# Altium PCB Attenuator_Proto.PcbDoc
Units mil, origin at the board's own origin, x right, y up, seen from the top; angles counter-clockwise.
Board outline 3339.97 x 2314.97 mil, 2 copper layers (Top Layer, Bottom Layer); 101 components, 60 nets, 413 pads, 43 vias.
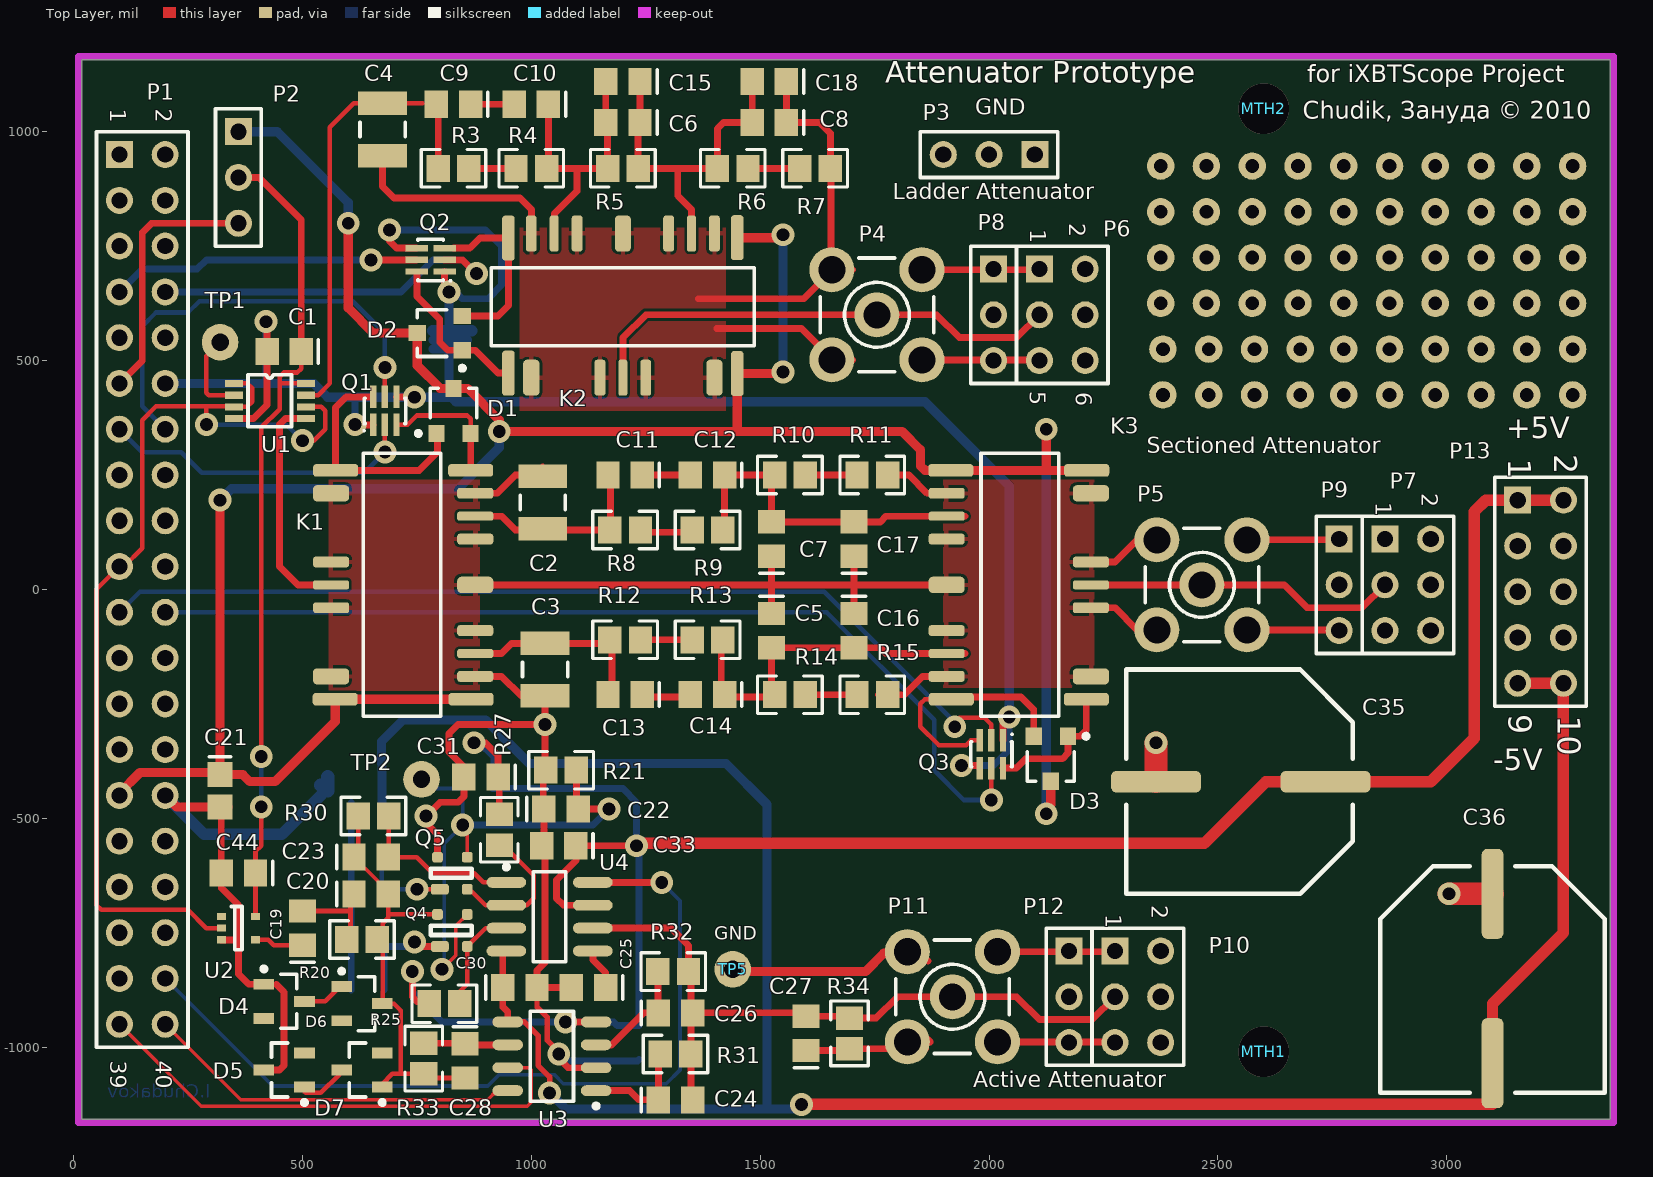
[diagram p0: Top Layer view]
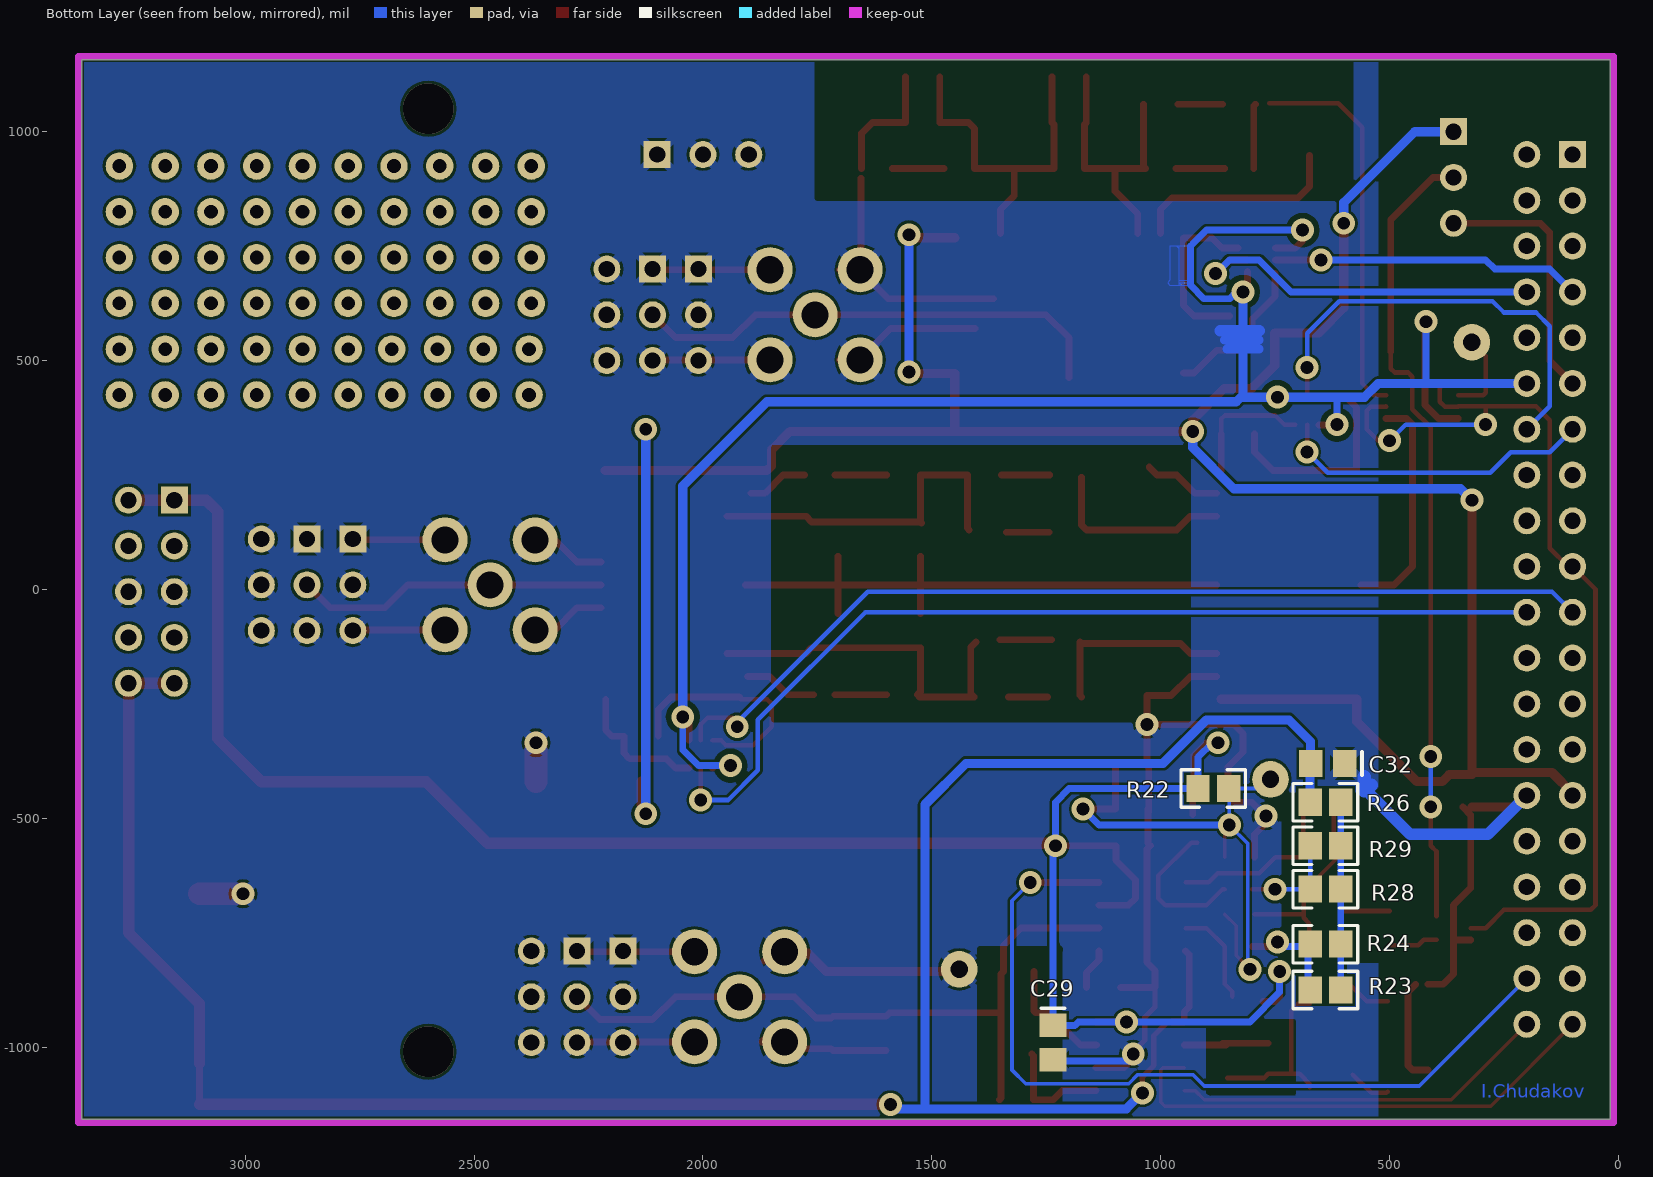
[diagram p1: Bottom Layer view, seen from below]

## Layer stack, top to bottom
Top Layer: signal copper 1.4
Dielectric: dielectric 12.6, FR-4, Dk 4.8
Bottom Layer: signal copper 1.4

## Board outline
17.52,-1157.48 17.52,1157.48 3357.48,1157.48 3357.48,-1157.48

## Design rules (kind name [scope] priority, off if disabled: settings)
Clearance [All] p1: gap=6
DiffPairsRouting [All] p1: maxlimit=10 minlimit=6 mostfreqgap=8 maxuncoupledlength=500
HoleSize [All] p1: absolutevalues=TRUE maxlimit=300 minlimit=13 maxpercent=80.000 minpercent=20.000
HoleToHoleClearance [All] p1: gap=6 allowstackedmicrovias=TRUE
MinimumAnnularRing [All] p1: minimumring=7
MinimumSolderMaskSliver [All] p1: minsoldermaskwidth=1
PlaneConnect [All] p1: planeconnectstyle=Relief reliefexpansion=20 reliefentries=4 reliefconductorwidth=20 reliefairgap=10
PolygonConnect [All] p1: connectstyle=Relief reliefconductorwidth=20 reliefentries=4 polygonreliefangle="45 Angle"
RoomDefinition Attenuator_Proto [InComponentClass('Attenuator_Proto')] p1: confinementstyle=ConfineOut formatcopy=TRUE lockcomponents=FALSE outline 60,1205 420,1205 420,1280 60,1280
RoomDefinition Att_steet_1 [InComponentClass('Att_steet_1')] p2: confinementstyle=ConfineOut formatcopy=TRUE lockcomponents=FALSE outline 40,-1305 220,-1305 220,-1210 40,-1210
RoutingVias [All] p1: holewidth=20 width=38 viastyle="Through Hole" minholewidth=13 minwidth=28 maxholewidth=28 maxwidth=50
SilkToSilkClearance [All] p1: silktosilkclearance=6
SilkscreenOverComponentPads [All] p1: minsilkscreentomaskgap=6
SolderMaskExpansion [All] p1: expansion=4
Width [All] p1: maxlimit=50 minlimit=6 preferedwidth=10
21 further rules are at their usual default settings.

## Classes and differential pairs
component class Attenuator_Proto: C1 C2 C3 C4 C5 C6 C7 C8 C9 C10 C11 C12 C13 C14 C15 C16 C17 C18 C21 D1 D2 D3 K1 K2 K3 MTH1 MTH2 P1 P2 P3 P4 P5 P6 P7 P8 P9 Q1 Q2 Q3 R3 R4 R5 R6 R7 R8 R9 R10 R11 R12 R13 R14 R15 TP1 U1
component class Att_steet_1: 1 C19 C20 C22 C23 C24 C25 C26 C27 C28 C29 C30 C31 C32 C33 C35 C36 C44 D4 D5 D6 D7 P10 P11 P12 P13 Q4 Q5 R20 R21 R22 R23 R24 R25 R26 R27 R28 R29 R30 R31 R32 R33 R34 TP2 TP5 U2 U3 U4

## Components (designator, comment, footprint, x,y, rotation, side; value= is the part's Value field where it differs from the comment)
C1 "Cap" C0805 460,520 r180 top
C2 "Cap Var" CAPC3225N 1025,190 r270 top
C3 "Cap Var" CAPC3225N 1030,-175 r90 top
C4 "Cap Var" CAPC3225N 675,1005 r90 top
C5 "Cap" c0805 1525,-90 r270 top
C6 "Cap" c0805 1200,1020 r180 top
C7 "Cap" c0805 1525,110 r90 top
C8 "Cap" c0805 1520,1020 r180 top
C9 "Cap" c0805 830,1060 r180 top
C10 "Cap" c0805 1000,1060 r180 top
C11 "Cap" c0805 1205,250 r180 top
C12 "Cap" c0805 1385,250 r180 top
C13 "Cap" c0805 1205,-230 r180 top
C14 "Cap" c0805 1385,-230 r180 top
C15 "Cap" c0805 1200,1110 r180 top
C16 "Cap" c0805 1705,-90 r270 top
C17 "Cap" c0805 1705,110 r90 top
C18 "Cap" c0805 1520,1110 r180 top
C19 "C0805" 0805#1 500,-740 r90 top
C20 "C0805" 0805#1 650,-665 r0 top
C21 "Cap Semi" CAPC2512L 320,-440 r270 top
C22 "C0805" 0805#1 1065,-480 r0 top
C23 "C0805" 0805#1 650,-585 r0 top
C24 "C0805" 0805#1 1315,-1115 r0 top
C25 "Cap Semi" C0805 1125,-870 r180 top
C26 "C0805" 0805#1 1315,-925 r0 top
C27 "C0805" 0805#1 1600,-970 r90 top
C28 "C0805" 0805#1 855,-1030 r270 top
C29 "C0805" 0805#1 1235,-990 r270 bottom
C30 "C0805" 0805#1 975,-870 r0 top
C31 "C0805" 0805#1 890,-410 r180 top
C32 "C0805" 0805#1 635,-380 r0 bottom
C33 "C0805" 0805#1 1060,-560 r180 top
C35 "Cap" H13 2550,-420 r90 top
C36 "Cap" H13 3100,-850 r180 top
C44 "Cap" C0805 360,-620 r180 top
D1 "BAS40-05" SOT-23 830,390 r0 top
D2 "BAS40-05" SOT-23 800,560 r90 top
D3 "BAS40-05" SOT-23 2135,-370 r180 top
D4 "Diode BAS21" SOT95P240-3N 460,-900 r0 top
D5 "Diode BAS21" SOT95P240-3N 460,-1050 r180 top
D6 "Diode BAS21" SOT95P240-3N 630,-905 r0 top
D7 "Diode BAS21" SOT95P240-3N 630,-1050 r180 top
K1 "HF3_2coils_latching" HF3-75_Ohm 720,10 r0 top
K2 "HF3_2coils_latching" HF3-75_Ohm 1200,620 r90 top
K3 "HF3_2coils_latching" HF3-75_Ohm 2065,10 r180 top
MTH1 "MOUNT_HOLE" MTHOLE_UEG_EU_BE 2600,-1010 r90 top
MTH2 "MOUNT_HOLE" MTHOLE_UEG_EU_BE 2600,1050 r90 top
P1 "Header 20X2" HDR2X20 100,950 r270 top locked
P2 "Header 3" HDR1X3 360,1000 r270 top
P3 "Header 3" HDR1X3 2100,950 r180 top
P4 "SMB" SMB_V-RJ45 1755,600 r0 top
P5 "SMB" SMB_V-RJ45 2465,10 r0 top
P6 "Header 3X2" HDR2X3 2110,700 r270 top
P7 "Header 3X2" HDR2X3 2865,110 r270 top
P8 "Header 3" HDR1X3 2010,700 r270 top
P9 "Header 3" HDR1X3 2765,110 r270 top
P10 "Header 3X2" HDR2X3 2275,-790 r270 top
P11 "SMB" SMB_V-RJ45 1920,-890 r0 top
P12 "Header 3" HDR1X3 2175,-790 r270 top
P13 "Header 5X2" HDR2X5 3155,195 r270 top
Q1 "DDCxxxxU" SOT-363 680,390 r0 top
Q2 "DDCxxxxU" SOT-363 780,720 r90 top
Q3 "DDCxxxxU" SOT-363 2005,-360 r180 top
Q4 "MOSFET" SOT143 825,-745 r0 top
Q5 "MOSFET" SOT143 825,-620 r0 top
R3 "Res2" 0805#2 830,920 r180 top
R4 "Res2" 0805#2 1000,920 r180 top
R5 "Res2" 0805#2 1200,920 r180 top
R6 "Res2" 0805#2 1440,920 r180 top
R7 "Res2" 0805#2 1620,920 r180 top
R8 "Res2" 0805#2 1205,130 r180 top
R9 "Res2" 0805#2 1385,130 r180 top
R10 "Res2" 0805#2 1565,250 r180 top
R11 "Res2" 0805#2 1745,250 r180 top
R12 "Res2" 0805#2 1205,-110 r180 top
R13 "Res2" 0805#2 1385,-110 r180 top
R14 "Res2" 0805#2 1565,-230 r180 top
R15 "Res2" 0805#2 1745,-230 r180 top
R20 "ERA6Y" 0805#2 630,-765 r180 top
R21 "ERA6Y" 0805#2 1065,-395 r180 top
R22 "ERA6Y" 0805#2 885,-435 r180 bottom
R23 "ERA6Y" 0805#2 640,-875 r0 bottom
R24 "ERA6Y" 0805#2 640,-775 r0 bottom
R25 "ERA6Y" 0805#2 810,-905 r0 top
R26 "ERA6Y" 0805#2 640,-465 r180 bottom
R27 "ERA6Y" 0805#2 930,-525 r270 top
R28 "ERA6Y" 0805#2 640,-655 r180 bottom
R29 "ERA6Y" 0805#2 640,-560 r180 bottom
R30 "ERA6Y" 0805#2 655,-495 r0 top
R31 "ERA6Y" 0805#2 1315,-1015 r0 top
R32 "ERA6Y" 0805#2 1310,-835 r0 top
R33 "ERA6Y" 0805#2 765,-1025 r270 top
R34 "ERA6Y" 0805#2 1695,-970 r90 top
TP1 "TESTPOINT" TESTPOINT 320,540 r0 top
TP2 "TESTPOINT" TESTPOINT 760,-415 r0 top
TP5 "TESTPOINT" TESTPOINT 1440,-830 r0 top
U1 "SN74LVC3G17DCTR" sm8 350,450 r0 top
U2 "SN74LVC1G17" SC_70_5 360,-740 r270 top
U3 "AD8180" SOIC127P600-8AL 1045,-1020 r180 top
U4 "AD707AR" SO-8_N 1040,-715 r0 top

## Footprints (in the part's own frame and the unit in brackets; to place one, negate y for a bottom-side part, rotate by r counter-clockwise, add the part's x,y. Pads: shape width x height; smd on the part's side, far side on the other; paste and mask are expansions set on the pad)
0805#1 [mm] "Chip Capacitor; Body 2.0 x 1.2 mm (LxW typ)"
  rect 1.3x1.5 smd: 1(-0.95,0) 2(0.95,0)
  silkscreen extent -1.9,-0.65 -1.9,0.65
0805#2 [mm] "0805 from SM-752 data"
  rect 1.3x1.5 smd: 1(-0.85,0) 2(0.85,0)
  silkscreen extent -1.79,-1.04 1.79,1.04, body extent -1.1,-0.72 1.1,0.72, height 1.1
C0805 [mm] "Chip Capacitor; Body 2.0 x 1.2 mm (LxW typ)"
  rect 1.3x1.5 smd: 1(-0.95,0) 2(0.95,0)
  silkscreen extent -1.9,-0.65 -1.9,0.65
c0805 [mm] "Chip Capacitor; Body 2.0 x 1.2 mm (LxW typ)"
  rect 1.3x1.5 smd: 1(-0.95,0) 2(0.95,0)
  silkscreen extent -1.9,-0.65 -1.9,0.65
CAPC2512L [mm] "Chip Capacitor, Body 2.54x1.27mm, IPC High Density"
  rect 1.4x1.4 smd: 1(-0.9,0) 2(0.9,0)
  silkscreen extent -1.9,-0.6 -1.9,0.6, body extent -1.45,-0.82 1.45,0.82, height 1.3
CAPC3225N [mm] "Chip Capacitor, Body 3.2x2.5mm, IPC Medium Density"
  rect 1.3x2.7 smd: 1(-1.45,0) 2(1.45,0)
  silkscreen extent -0.4,-1.25 0.4,1.25, body extent -1.7,-1.35 1.7,1.35, height 1.5
H13 [mm] "Lyt aluminum Cap SMD"
  rrect50% 1.2x5 smd: 1(0,-4.699) 2(0,4.699)
  silkscreen extent -6.22,-6.22 6.22,6.35
HDR1X3 [mm] "Connector; Header; 3 Position"
  rect 1.5x1.5 hole 0.9: 1(0,0)
  round 1.5 hole 0.9: 2(2.54,0) 3(5.08,0)
  silkscreen extent -1.27,-1.27 6.35,1.27
HDR2X3 [mm] "Connector; Header; 3x2 Position"
  rect 1.5x1.5 hole 0.9: 1(0,0)
  round 1.5 hole 0.9: 2(0,2.54) 3(2.54,0) 4(2.54,2.54) 5(5.08,0) 6(5.08,2.54)
  silkscreen extent -1.27,-1.27 6.35,3.81
HDR2X5 [mm] "Connector; Header; 5x2 Position"
  rect 1.5x1.5 hole 0.9: 1(0,0)
  round 1.5 hole 0.9: 2(0,2.54) 3(2.54,0) 4(2.54,2.54) 5(5.08,0) 6(5.08,2.54) 7(7.62,0) 8(7.62,2.54) 9(10.16,0) 10(10.16,2.54)
  silkscreen extent -1.27,-1.27 11.43,3.81
HDR2X20 [mm] "Connector; Header; 20x2 Position"
  rect 1.5x1.5 hole 0.9: 1(0,0)
  round 1.5 hole 0.9: 2(0,2.54) 3(2.54,0) 4(2.54,2.54) 5(5.08,0) 6(5.08,2.54) 7(7.62,0) 8(7.62,2.54) 9(10.16,0) 10(10.16,2.54) 11(12.7,0) 12(12.7,2.54) 13(15.24,0) 14(15.24,2.54) 15(17.78,0) 16(17.78,2.54) 17(20.32,0) 18(20.32,2.54) 19(22.86,0) 20(22.86,2.54) 21(25.4,0) 22(25.4,2.54) 23(27.94,0) 24(27.94,2.54) 25(30.48,0) 26(30.48,2.54) 27(33.02,0) 28(33.02,2.54) 29(35.56,0) 30(35.56,2.54) 31(38.1,0) 32(38.1,2.54) 33(40.64,0) 34(40.64,2.54) 35(43.18,0) 36(43.18,2.54) 37(45.72,0) 38(45.72,2.54) 39(48.26,0) 40(48.26,2.54)
  silkscreen extent -1.27,-1.27 49.53,3.81
HF3-75_Ohm [mm]
  rrect50% 2.5x0.7 smd: 1(-3.746,6.35) 11(-3.771,-6.35) 12(3.771,-6.35) 22(3.747,6.35)
  rrect50% 2x0.9 smd: 2(-4,5.08) 10(-4,-5.08) 17(4,0)
  rrect50% 2x0.6 smd: 5(-4,1.27) 7(-4,-1.27) 13(4,-5.08) 15(4,-2.54) 19(4,2.54) 21(4,5.08)
  rrect50% 2x0.5 smd: 6(-4,0) 14(4,-3.81) 20(4,3.81)
  silkscreen extent -2.22,-7.3 2.1,7.3, body extent -3.56,-7.37 3.56,7.37, height 10
MTHOLE_UEG_EU_BE [mil]
SC_70_5 [mil]
  rect 15.73x19.67 smd: 1(-25.58,-37.4) 2(0,-37.4) 3(25.58,-37.4) 4(25.58,37.4) 5(-25.58,37.4)
  silkscreen extent -47,-16 47,8
sm8 [mm]
  rect 1x0.4 smd: 1(0,0) 2(0,-0.65) 3(0,-1.3) 4(0,-1.95) 5(4,-1.95) 6(4,-1.3) 7(4,-0.65) 8(4,0)
  silkscreen extent 0.79,-2.41 3.2,0.48, body extent 0.69,-2.51 3.3,0.58, height 1.3
SMB_V-RJ45 [mm] "Connector; SMB Straight"
  round 2.5 hole 1.5: 1(0,0) 2(-2.5,-2.5) 2(-2.5,2.5) 2(2.5,-2.5) 2(2.5,2.5)
  silkscreen extent -3.15,-3.15 3.15,3.15
SO-8_N [mm] "SOIC, 8-Leads, Body 4.9x3.9mm, Pitch 1.27mm, IPC Medium Density"
  oval 2.2x0.6 smd: 1(-2.4,1.905) 2(-2.4,0.635) 3(-2.4,-0.635) 4(-2.4,-1.905) 5(2.4,-1.905) 6(2.4,-0.635) 7(2.4,0.635) 8(2.4,1.905)
  silkscreen extent -2.52,-2.5 0.9,2.88, body extent -1.95,-2.45 1.95,2.45, height 1.75
SOIC127P600-8AL [mm] "SOIC, 8-Leads, Body 4.9x3.9mm, Pitch 1.27mm, IPC High Density"
  oval 1.7x0.6 smd: 1(-2.45,1.905) 2(-2.45,0.635) 3(-2.45,-0.635) 4(-2.45,-1.905) 5(2.45,-1.905) 6(2.45,-0.635) 7(2.45,0.635) 8(2.45,1.905)
  silkscreen extent -2.58,-2.5 1.2,2.88, body extent -2,-2.5 2,2.5, height 2.72
SOT95P240-3N [mm] "SOT23, 3-Leads, Body 2.9x1.3mm, Pitch 0.95mm, Lead Span 2.4mm, IPC Medium Density"
  rect 1.15x0.6 smd: 1(-1.125,0.95) 2(-1.125,-0.95) 3(1.125,0)
  silkscreen extent -1.25,-1.5 0.7,1.92, body extent -0.7,-1.5 0.7,1.5, height 1.14
SOT143 [mm]
  rrect50% 1x0.6 smd: 1(-0.635,-0.889)
  rrect50% 0.6x0.6 smd: 2(0.889,-0.889) 3(0.889,0.889) 4(-0.762,0.889)
  silkscreen extent -1.14,-0.25 1.14,0.25
SOT-23 [mm] "SOT-23; 3 Leads; Body 3.0 x 2.6 mm, inc. leads (LxW max)"
  rect 0.9x0.95 smd: 1(-0.95,-1.25) 2(0.95,-1.25) 3(0,1.25)
  silkscreen extent -2.07,-1.37 1.3,1.25
SOT-363 [mm] "SOT-363/SC-88; 6 Leads; Body 2.2 x 2.2 mm, inc. leads (LxW max)"
  rect 0.35x1.25 smd: 1(-0.65,-0.775) 2(0,-0.775) 3(0.65,-0.775) 4(0.65,0.775) 5(0,0.775) 6(-0.65,0.775)
  silkscreen extent -1.2,-1.15 1.15,0.7
TESTPOINT [mil]
  round 80 hole 37.99: 1(0,0)

## Part data
C1 C5 C6 C7 C8 C9 C10 C11 C12 C13 C14 C15 C16 C17 C18 C44: "Capacitor"
C2 C3 C4: "Variable or Adjustable Capacitor"
C19 C20 C22 C23 C24 C26 C27 C28 C29 C30 C31 C32 C33: "Ceramic Chip Capacitor - Standard"
C21 C25: "Capacitor (Semiconductor SIM Model)"
C35 C36: library part "Lyt Cap"
D1 D2 D3: "Silicon AF Schottky Diode for High-Speed Switching"
D4 D5 D6 D7: "Silicon Switching Diode for High-Speed, High-Voltage Switching"
K1 K2 K3: "HF3 Relay, Latching type, 2 coils"
P1: "Header, 20-Pin, Dual row"
P2 P3 P8 P9 P12: "Header, 3-Pin"
P4 P5 P11: "SMB Straight Connector"
P6 P7 P10: "Header, 3-Pin, Dual row"
P13: "Header, 5-Pin, Dual row"
Q1 Q2 Q3: "NPN PRE-BIASED SMALL SIGNAL DUAL SURFACE MOUNT TRANSISTOR"
Q4 Q5: library part BF998, "Dual-gate MOSFET"
R3 R4 R5 R6 R7 R8 R9 R10 R11 R12 R13 R14 R15: "Resistor"
R20 R21 R22 R23 R24 R25 R26 R27 R28 R29 R30 R31 R32 R33 R34: "Rectangular Thick Film Chip Resistor, 10 Ohm to 1M Ohm Range, 0.1% and 0.5% Tolerance, 0805 Size, 0.1 W"
TP1 TP2 TP5: "TEST POINT.  No entry in BOM."
U4: "Ultra-Low Drift Operational Amplifier"

## Free pads (board coordinates)
  round 60 hole 30: 0(2380,525) 0(2480,525) 0(2580,525) 0(2680,525) 0(2775,525) 0(2875,525) 0(2875,625) 0(2875,725) 0(2875,825) 0(2875,925) 0(2975,525) 0(3075,525) 0(3175,525) 0(3275,525) 1(2380,425) 1(2480,425) 1(2580,425) 1(2680,425) 1(2775,425) 1(2775,625) 1(2775,725) 1(2775,825) 1(2775,925) 1(2875,425) 1(2975,425) 1(3075,425) 1(3175,425) 1(3275,425) 2(2675,625) 2(2675,725) 2(2675,825) 2(2675,925) 2(3275,625) 2(3275,725) 2(3275,825) 2(3275,925) 3(2575,625) 3(2575,725) 3(2575,825) 3(2575,925) 3(3175,625) 3(3175,725) 3(3175,825) 3(3175,925) 4(2475,625) 4(2475,725) 4(2475,825) 4(2475,925) 4(3075,625) 4(3075,725) 4(3075,825) 4(3075,925) 5(2375,625) 5(2375,725) 5(2375,825) 5(2375,925) 5(2975,625) 5(2975,725) 5(2975,825) 5(2975,925)

## Via types
v1: diameter 50, hole 28, Top Layer to Bottom Layer, 41 vias
v2: diameter 110.24, hole 110.24, Top Layer to Bottom Layer, 2 vias

## Nets (pads, with @x,y where several pads share a name; then routed paths per layer and width w, separated by ;. In a path a pad name is that pad's centre, name@x,y a point inside that pad or via, vN(x,y) a via of type N, cw(c..) or ccw(c..) an arc to the next point about the centre after c; other vN are vias at no path point)
3V: C21.1 D1.3 D2.3 D3.3 K1.11 K1.12 K2.11 K2.12 K3.11 K3.12 P1.29 P2.1 | length 6200.7
  Top Layer w20: P1.29 100,-445 145,-400 315.43,-400 C21.1 ; v1(320,195) C21.1 ; v1(600,800) 600,615 655,560 D2.3 750.79,489.21 800.79,439.21 D1.3 860.79,439.21 930,370 v1(930,345) 1450,345 ; K1.12 K1.11 571.52,-288.48 440,-420 385,-420 369.57,-404.57 C21.1 ; K2.12 1543.48,768.48 v1(1550,775) ; v1(1550,475) 1546.52,471.52 K2.11 1450,345 ; v1(2125,-490) 2130,-480 2135,-470 D3.3 ; v1(2125,350) 2125,260 ; K3.11 2125,260 ; 1450,345 1810,345 1850,305 1850,270 1860,260 K3.12 2125,260
  Bottom Layer w20: v1(320,195) 345,220 840,220 930,310 v1(930,345) ; P2.1 445,1000 600,845 v1(600,800) ; v1(1550,475) v1(1550,775) ; v1(2125,-490) v1(2125,350)
5V: P1.11 P2.3 | length 569
  Top Layer w15: P1.11 150,500 150,780 170,800 P2.3
+5V: C29.1 C31.1 C33.1 C35.1 P13.1 P13.2 R22.1 R25.1 R27.1 U3.4 U4.7 | length 4826.8
  Top Layer w15: v1(740,-835) 740,-890 750,-900 R25.1@776.54,-900 ; 900,-335 927.4,-362.4 C31.1 930,-412.6 R27.1 ; v1(1075,-945) U3.4 ; U4.7 1070,-690 1055,-675 1055,-635 1097.4,-592.6 C33.1 v1(1230,-560)
  Top Layer w20: v1@1225,-565 v1@1235,-555
  Top Layer w25: v1@1235,-555 2470,-555 2605,-420 C35.1 2965,-420 3060,-325 3060,170 3085,195 P13.1 P13.2
  Bottom Layer w15: v1(740,-835) 740,-880 805,-945 v1(1075,-945) 1180,-945 1187.6,-952.6 C29.1 v1@1235,-560 ; v1(875,-335) 886.93,-335 918.46,-366.54 R22.1 ; R22.1@915,-435 R22.1 ; v1(1230,-560) 1230,-465 1200,-435 R22.1
-5V: C30.1 C32.2 C36.2 P13.9 P13.10 R26.1 U3.5 U4.4 | length 5312.3
  Top Layer w12: U3.5 985,-945 1015,-975 1015,-1040 1040,-1065 v1(1040,-1100)
  Top Layer w15: U4.4 937.6,-797.91 C30.1 937.6,-912.6 948.54,-923.54 U3.5 U3.5@975,-945 ; C36.2@3100,-1125 C36.2
  Top Layer w25: v1@1585,-1135 1595,-1125 C36.2@3100,-1125 ; C36.2 3100,-905 3255,-750 P13.10 P13.9
  Bottom Layer w20: R26.1 673.46,-381.06 C32.2 672.4,-332.6 720,-285 900,-285 995,-380 1425,-380 1515,-470 1515,-1135 ; v1(1040,-1100) 1075,-1135 1515,-1135 ; v1(1590,-1125) 1580,-1135 1515,-1135
ATT1: C4.2 C9.2 R3.2 U1.7 | length 988.9
  Top Layer w10: U1.7 534.41,424.41 560,450 560,1010 612.09,1062.09 762.6,1062.09
  Top Layer w15: C9.2 796.54,1056.06 R3.2
ATT2: K1.6 U1.5 | length 502
  Top Layer w15: U1.5 463.23,373.23 450,360 450,50 490,10 K1.6
ATT10: C2.2 C11.2 K1.20 R8.2 | length 416.1
  Top Layer w15: K1.20 935,160 965,130 1161.54,130 1172.6,141.06 C11.2@1172.6,245
ATT100: C3.2 C13.2 K1.14 R12.2 | length 431
  Top Layer w15: K1.14 935,-140 957.09,-117.91 C3.2 1173.62,-117.91 1176.54,-115 1176.54,-231.06 C13.2@1172.6,-235
CLK: P1.19 U1.1 U1.3 U1.6 U2.2 | length 2144.5
  Top Layer w10: v1(290,360) 290,400 ; U2.2 290,-740 250,-700 60,-700 50,-690 50,0 P1.19 110,50 150,90 150,370 180,400 290,400 ; U1.3 378.82,398.82 390,410 390,440 380,450 U1.1 ; U1.3@350,400 290,400 ; v1(500,325) 525,325 550,350 550,390 541.18,398.82 U1.6 U1.6@508.66,400
  Bottom Layer w10: v1(290,360) 465,360 v1(500,325)
GND: C1.2 C2.1 C3.1 C4.1 C5.1 C7.1 C8.1 C16.1 C17.1 C18.1 C21.2 C22.1 C25.2 C27.1 C29.2 C30.2 C31.2 C32.1 C33.2 C35.2 C36.1 C44.2 D4.1 D5.3 K1.2 K1.5 K1.7 K1.10 K1.13 K1.15 K1.17 K1.19 K1.21 K2.2 K2.5 K2.7 K2.10 K2.13 K2.15 K2.17 K2.19 K2.21 K3.2 K3.5 K3.7 K3.10 K3.13 K3.15 K3.17 K3.19 K3.21 P1.12 P1.30 P3.1 P3.2 P3.3 P4.2 P5.2 P6.1 P6.2 P6.4 P6.5 P6.6 P7.1 P7.2 P7.4 P7.5 P7.6 P8.1 P8.2 P8.3 P9.1 P9.2 P9.3 P10.1 P10.2 P10.4 P10.5 P10.6 P11.2 P12.1 P12.2 P12.3 P13.5 P13.6 Q1.1 Q1.4 Q2.1 Q2.4 Q3.1 Q3.4 Q5.4 R7.1 R11.1 R15.1 R21.2 R34.1 TP5.1 U1.4 U2.3 U3.2 | length 13361.7
  Top Layer w12: C30.2 1012.4,-912.4 1035,-935 1035,-985 1055,-1005 v1@1055,-1020
  Top Layer w15: U2.3 355.58,-765.58 360,-770 ; C21.2@340,-475.43 322.6,-492.83 C44.2 322.6,-652.6 360,-690 360,-770 ; U1.4 393.23,373.23 422.6,402.6 C1.2 v1@422.6,572.4 ; D5.3 450,-1050 460,-1040 460,-880 442.6,-862.6 ; D4.1 382.6,-862.6 360,-840 360,-770 ; v1@615.51,359.49 Q1.1 ; C4.1 675,880 700,855 975,855 1000,830 K2.21 ; v1@690,761.18 705.59,745.59 Q2.4 ; Q1.4 v1@744.49,420.51 ; Q5.4 795,-535 770,-510 v1(770,-495) 800,-465 840,-465 852.6,-452.4 C31.2 852.6,-387.6 820,-355 820,-315 840,-295 v1(1030,-295) C3.1 977.09,-232.09 935,-190 K1.13 ; v1@810.51,659.49 Q2.1 ; K1.17 1525,10 ; K1.21 925,210 965,250 1007.91,250 C2.1@1025,267.09 ; C22.1@1026.06,-485 1026.06,-388.94 1030,-385 1030,-316.54 v1@1028.46,-315 ; C22.1 1027.6,-555 C33.2 1030,-567.4 1030,-815 1012.4,-832.6 C30.2 C25.2 ; v1@1050,-1015 1055,-1020 1080,-1045 U3.2 ; 1365,635 1595,635 1658.43,698.43 P4.2@1701.57,698.43 ; 1405,570 1590,570 1658.43,501.57 P4.2@1701.57,501.57 ; C5.1 1525,10 ; C7.1 1525,10 ; C18.1@1557.4,1120 C8.1 1630,1020 1653.46,996.54 R7.1 ; C27.1 1716.06,-1007.4 1720,-1003.46 P11.2@1861.61,-1003.46 ; P4.2@1655,698.43 R7.1@1655,898.46 ; C16.1 1705,10 ; C17.1 1705,10 ; R15.1@1758.46,-230 1815,-230 1854.99,-190.01 K3.21@1902.52,-190.01 ; R11.1 1825,250 1865,210 K3.13@1895,210 ; P11.2@1850,-795 1866.57,-811.57 ; P4.2@1853.43,698.43 P6.1@2098.43,698.43 ; P11.2@1866.61,-983.46 1871.57,-988.43 ; P4.2@1898.43,501.57 P6.5@2098.43,501.57 ; K3.17 1705,10 ; v1(1940,-385) 1973.9,-385 Q3.4 ; P8.3@2008.43,501.57 P8.3 ; P8.1@2008.43,698.43 P8.1 ; Q3.1 v1@2030.59,-289.41 ; 2068.43,-988.43 P10.5@2248.43,-988.43 ; 2068.43,-791.57 P10.1@2248.43,-791.57 ; P12.3@2173.43,-988.43 P12.3 ; P12.1@2173.43,-791.57 P12.1 ; K3.5 2275,-40 2323.43,-88.43 P5.2@2366.57,-88.43 ; K3.7 2275,60 2323.43,108.43 P5.2@2366.57,108.43 ; P5.2@2353.43,108.43 P5.2@2366.57,108.43 ; P5.2@2360,115 P5.2@2366.57,108.43 ; P5.2@2563.43,-88.43 2763.43,-88.43 P9.3 ; P5.2@2563.43,108.43 2763.43,108.43 P9.1 ; 1525,10 1705,10
  Top Layer w20: P1.30 225.43,-475.43 C21.2 ; TP5.1@1440,-835 1730,-835 1770,-795 P11.2@1850,-795
  Top Layer w50: C35.2 v1(2365,-335) ; v1(3005,-665) C36.1
  Bottom Layer w15: 420,455 v1(420,585) ; v1(615,360) 615,420 ; v1(690,785) 900,785 930,755 ; v1(820,650) 835,650 850,635 905,635 935,665 935,750 ; v1(1060,-1015) 1050,-1015 1065,-1030 1232.4,-1030 C29.2 ; v1(1940,-385) 2010,-385 2044.05,-350.95 v1(2044.05,-278.5)
  Bottom Layer w20: P1.12 525,450 555,420 615,420 v1(745,420) 820,420 ; 785,525 820,525 ; 785,545 820,545 ; v1(820,650) 820,565 820,545 ; 855,525 820,525 ; 860,545 820,545 ; v1(2044.05,-278.5) 2044.05,225.95 1860,410 835,410 820,425 820,525 ; 820,525 820,545
  Bottom Layer w25: P1.30 285,-535 455,-535 542.5,-447.5 ; 785,565 820,565 870,565
  Bottom Layer w30: 540,-427.57 552.43,-440 555,-440 555.06,-439.94 555.06,-410
IN2_10: P1.13 Q1.2 | length 697.5
  Top Layer w10: v1(680,300) Q1.2
  Bottom Layer w10: P1.13 150,300 235,300 280,255 635,255 v1(680,300)
IN2_100: P1.14 Q1.5 | length 967
  Top Layer w10: Q1.5 v1(680,485)
  Bottom Layer w10: P1.14 150,400 150,575 180,605 250,605 275,630 610,630 680,560 v1(680,485)
NetC5_2: C5.2 C14.1 C16.2 K3.20 R13.1 R14.2 | length 787.2
  Top Layer w15: R13.1@1403.46,-115 1415,-126.54 1415,-227.4 1407.4,-235 1526.54,-235 R14.2 1525,-223.46 C5.2 C16.2 1762.4,-127.4 1775,-140 1947.52,-140
NetC6_1: C6.1 C8.2 C15.1 C18.2 K2.14 R5.1 R6.2 | length 797.8
  Top Layer w15: C15.1@1237.4,1120 C6.1 1233.46,1016.06 R5.1 1320,920 ; K2.14 1350,830 1320,860 1320,920 ; C18.2@1482.6,1120 C8.2 1420,1020 1406.54,1006.54 R6.2 1320,920
NetC6_2: C6.2 C10.1 C15.2 K2.20 R4.1 R5.2 | length 639.6
  Top Layer w15: C10.1 1037.4,923.94 R4.1 R5.2 1166.54,1016.06 C6.2 C15.2@1162.6,1120 ; K2.20 1050,820 1100,870 1100,920
NetC7_2: C7.2 C12.1 C17.2 K3.14 R9.1 R10.2 | length 758
  Top Layer w15: R9.1 1422.4,133.94 C12.1 1525,250 C7.2 ; C7.2@1522.6,145 C7.2 ; 1947.52,160 1775,160 1762.4,147.4 C17.2 C7.2
NetC9_1: C9.1 C10.2 | length 97.6
  Top Layer w15: C9.1@865,1060 C10.2
NetC11_1: C11.1 C12.2 | length 105.2
  Top Layer w15: C11.1 C12.2
NetC13_1: C13.1 C14.2 | length 85.2
  Top Layer w15: C13.1@1247.4,-235 C14.2@1332.6,-235
NetC19_1: C19.1 U2.4 | length 107.5
  Top Layer w10: U2.4 425.58,-765.58 437.4,-777.4 C19.1
NetC19_2: C19.2 C20.1 R20.2 | length 212.9
  Top Layer w10: C19.2 605,-702.6 ; C20.1 605,-672.6 605,-753.46 R20.2@616.54,-765
NetC20_2: C20.2 C23.1 C28.2 D6.3 D7.1 Q4.4 R20.1 R30.1 R33.2 | length 941.3
  Top Layer w8: C23.1 687.4,-659.8 C20.2
  Top Layer w10: C23.1@617.6,-585 621.54,-581.06 R30.1 ; D7.1 674.29,-1080.71 696.54,-1058.46 715,-1058.46 ; C20.2 687.4,-710 ; Q4.4 687.4,-710 ; C28.2 773.94,-1067.4 R33.2 715,-1058.46 ; 687.4,-710 687.4,-717.6 675,-730 675,-904.29 D6.3 700,-905 715,-920 715,-1058.46
NetC22_2: C22.2 Q4.3 Q5.3 R21.1 R22.2 TP2.1 | length 1245.1
  Top Layer w8: v1@800,-830 v1(805,-830) 835,-800 835,-735 Q4.3 ; v1(850,-515) 860,-525 Q5.3
  Top Layer w15: C22.2@1098.46,-480 R21.1@1098.46,-385 ; C22.2 v1(1170,-480)
  Bottom Layer w8: TP2.1 780,-435 R22.2 850,-436.54 v1(850,-515) ; v1(805,-830) 800,-830 810,-820 810,-555 v1(850,-515) ; v1@846.54,-518.46 v1(850,-515)
  Bottom Layer w15: v1(850,-515) 1135,-515 v1(1170,-480)
NetC23_2: C23.2 R30.2 U4.1 | length 367.5
  Top Layer w10: R30.2 688.46,-581.06 692.4,-585 750,-585 785,-620 875,-620 895,-640 U4.1
NetC24_1: C24.1 R31.1 U3.1 | length 246.1
  Top Layer w15: U3.1 1215,-1095 1235,-1115 C24.1 1277.6,-1018.94 R31.1
NetC25_1: C25.1 U4.5 | length 91.6
  Top Layer w15: U4.5 1134.49,-809.49 1162.4,-837.4 C25.1
NetC26_1: C26.1 R32.1 U3.3 | length 253.2
  Top Layer w15: U3.3@1140,-995 1175,-995 1245,-925 1272.6,-925 1276.54,-921.06 R32.1
NetC28_1: C28.1 R33.1 U3.6 | length 195
  Top Layer w15: R33.1 863.94,-991.54 C28.1@865,-992.6 ; C28.1 857.4,-995 U3.6
NetD1_1: D1.1 K1.1 Q1.6 | length 503.6
  Top Layer w15: Q1.6@650,420.51 595.51,420.51 572.52,397.52 K1.1 755,260 795,300 D1.1@795,340
NetD1_2: D1.2 K1.22 Q1.3 | length 286
  Top Layer w10: Q1.3 729.49,359.49 750,380 860,380 867.52,372.48 D1.2@867.52,340
  Top Layer w15: K1.22 D1.2@867.52,340
NetD2_1: D2.1 K2.1 Q2.6 | length 348.7
  Top Layer w15: Q2.6@750,690 750,640 800,590 800,540 817.4,522.6 D2.1 877.4,522.6 927.48,472.52 K2.1
NetD2_2: D2.2 K2.22 Q2.3 | length 386.2
  Top Layer w15: Q2.3@830.51,745.59 865.59,745.59 887.52,767.52 895,767.52 K2.22 950,620 927.4,597.4 D2.2
NetD3_1: D3.1 K3.1 Q3.6 | length 305.3
  Top Layer w15: Q3.6 2059.49,-390.51 2080,-370 2160,-370 2172.4,-357.6 D3.1 2199.21,-320.79 2212.48,-307.52 K3.1
NetD3_2: D3.2 K3.22 Q3.3 | length 519.2
  Top Layer w10: K3.22 1860,-240 1850,-250 1850,-300 1890,-340 1950,-340 1960.51,-329.49 Q3.3
  Top Layer w15: K3.22@1920,-235 2070,-235 2097.6,-262.6 D3.2
NetD4_3: D4.3 D6.1 | length 98.6
  Top Layer w10: D4.3 550,-900 D6.1@587.4,-862.6
NetD5_1: D5.1 D7.3 | length 93.4
  Top Layer w10: D5.1@504.29,-1097.4 506.89,-1100 540,-1100 D7.3@580,-1060
NetQ4_1: Q4.1 R23.2 R24.2 | length 235.7
  Top Layer w15: v1@750,-780 Q4.1
  Bottom Layer w15: R23.2@678.46,-875 678.46,-775 683.46,-780 750,-780 745,-775 v1(745,-770)
NetQ4_2: Q4.2 R25.2 U4.3 | length 218.9
  Top Layer w10: R25.2@843.46,-890 843.46,-878.54 860,-862 Q4.2 900,-740 U4.3
NetQ5_1: Q5.1 R28.1 R29.1 | length 221.5
  Top Layer w10: v1(750,-655) Q5.1
  Bottom Layer w10: R29.1 R28.1 v1(750,-655)
NetQ5_2: Q5.2 R27.2 U4.2 | length 330.3
  Top Layer w10: Q5.2 865,-655 900,-690 U4.2 990,-690 1005,-675 1005,-625 933.46,-553.46 R27.2@920,-553.46
NetR3_1: R3.1 R4.2 | length 106.5
  Top Layer w15: R3.1@860,920 R4.2
NetR6_1: R6.1 R7.2 | length 113.1
  Top Layer w15: R6.1 R7.2
NetR8_1: R8.1 R9.2 | length 93.1
  Top Layer w15: R8.1@1243.46,125 R9.2@1336.54,125
NetR10_1: R10.1 R11.2 | length 113.1
  Top Layer w15: R10.1 R11.2
NetR12_1: R12.1 R13.2 | length 113.1
  Top Layer w15: R12.1 R13.2
NetR14_1: R14.1 R15.2 | length 113.1
  Top Layer w15: R14.1 R15.2
NetR23_1: R23.1 R24.1 R26.2 R28.2 R29.2 | length 410
  Bottom Layer w15: R23.1 R24.1 R28.2 R29.2 R26.2
NetTP1_1: TP1.1 U1.2 | length 184.7
  Top Layer w10: TP1.1 290,510 290,430 295.59,424.41 U1.2
OP_EN: P1.38 U4.8 | length 1830.5
  Top Layer w15: U4.8 v1(1285,-640)
  Bottom Layer w8: P1.38 435,-1085 905,-1085 930,-1060 1050,-1060 1070,-1080 1295,-1080 1325,-1050 1325,-680 v1(1285,-640)
OUT1: K2.6 P4.1 P6.3 | length 1059.6
  Top Layer w15: K2.6 1200,550 1250,600 1885,600 1935,550 2060,550 P6.3
OUT1_10: P1.8 Q2.2 | length 803.8
  Top Layer w15: Q2.2@810,720 Q2.2 850,720 v1(880,690)
  Bottom Layer w15: P1.8 715,650 785,720 850,720 v1(880,690)
OUT1_100: P1.7 Q2.5 | length 678.5
  Top Layer w15: v1(650,720) Q2.5
  Bottom Layer w15: P1.7 150,700 270,700 290,720 v1(650,720)
OUT2: K3.6 P5.1 P7.3 | length 683.9
  Top Layer w15: K3.6 P5.1 2645,10 2695,-40 2815,-40 P7.3
OUT2_10: P1.21 Q3.2 | length 2106.5
  Top Layer w10: v1(1925,-300) 1925,-290 1935,-280 1990,-280 2005,-295 Q3.2
  Bottom Layer w10: P1.21 145,-5 1640,-5 1925,-290 v1(1925,-300)
OUT2_100: P1.22 Q3.5 | length 2108.8
  Top Layer w10: v1(2005,-460) Q3.5
  Bottom Layer w10: P1.22 1645,-50 1880,-285 1880,-395 1945,-460 v1(2005,-460)
OUT3_1_2: P1.39 U3.7 | length 1101.4
  Top Layer w8: P1.39 279,-1129 991,-1129 1000,-1120 1000,-1050 995,-1045 U3.7
OUT3_MAIN: C24.2 C26.2 C27.2 P10.3 P11.1 R31.2 R32.2 R34.2 U4.6 | length 1553.2
  Top Layer w15: U4.6 1305,-740 1343.46,-778.46 R32.2 1348.46,-840 R31.2 1348.46,-1111.06 C24.2 ; C26.2 1592.4,-925 C27.2 1716.06,-932.6 1720,-936.54 1753.46,-936.54 1800,-890 2060,-890 2110,-940 2225,-940 P10.3
SEL3A: P1.40 U3.8 | length 825.2
  Top Layer w8: P1.40 365,-1115 905,-1115 925,-1095 U3.8
SEL3B: P1.24
SRCV: C1.1 C44.1 P2.2 U1.8 U2.5 | length 1814.2
  Top Layer w10: U2.5 C44.1 397.4,-572.6 410,-560 v1(410,-475) ; v1(410,-365) 410,354 450,394 450,450 ; C1.1 497.4,482.4 489,474 459,474 450,465 450,450 ; U1.8 450,450
  Top Layer w15: P2.2 405,900 497.4,807.6 C1.1
  Bottom Layer w10: v1(410,-475) v1(410,-365)
pads on no net: D4.2 D5.2 D6.2 D7.2 P1.1 P1.2 P1.3 P1.4 P1.5 P1.6 P1.9 P1.10 P1.15 P1.16 P1.17 P1.18 P1.20 P1.23 P1.25 P1.26 P1.27 P1.28 P1.31 P1.32 P1.33 P1.34 P1.35 P1.36 P1.37 P13.3 P13.4 P13.7 P13.8 U2.1
copper on no net:
  other v2: 2600,-1010 2600,1050

## Polygon pours and split planes (outlines as drawn)
GND on Top Layer "Top Layer-No Net" (solid, pour order 1002): 975,790 1425,790 1425,405 975,405 975,790
GND on Top Layer "Top Layer-No Net" (solid, pour order 1001): 567.03,239.09 886.88,239.09 886.88,-220.91 556.88,-220.91 556.88,239.09 567.03,239.09
GND on Top Layer "Top Layer-No Net" (solid, pour order 1000): 1910.15,240 2230,240 2230,-215 1900,-215 1900,240 1910.15,240
GND on Bottom Layer "Top Layer-No Net" (solid, pour order 1003): 525,1165 525,-1160 520,-1165 3365,-1165 3365,1165 525,1165
GND on Bottom Layer "GND_POINT" (solid, pour order 1008): 935,750 960,750 960,675 935,675 935,750
GND on Bottom Layer "Top Layer-No Net" (solid, pour order 1007): 935,750 960,750 960,670 940,670 935,675 935,750
GND on Bottom Layer "Top Layer-No Net" (solid, pour order 1006): 935,750 965,750 960,745 960,665 935,665 935,750
GND on Bottom Layer "Top Layer-No Net" (solid, pour order 1005): 935,750 960,750 960,670 955,665 935,665 935,750
GND on Bottom Layer "Top Layer-No Net" (solid, pour order 1004): 935,750 980,750 980,675 985,670 980,665 935,665 935,750
no net on Mechanical 13 "Top Layer-No Net" (solid): 1219.23,-785 1395,-785 1395,-1150 1220.37,-1150 1220.37,-795.43 1219.23,-785
no net on Mechanical 13 "KeepOut" (solid): 710,-945 895,-945 895,-1105 890,-1100 710,-1100 710,-945
no net on Mechanical 13 "KeepOut" (solid): 530,-450 730,-450 730,-810 525,-810 525,-455 530,-450
no net on Mechanical 13 "Top Layer-No Net" (solid): 940,310 1845,310 1845,-285 940,-285 940,310
no net on Mechanical 13 "Top Layer-No Net" (solid): 585,1155 1750,1155 1750,855 585,855 585,1155

## Keep-outs
Keep-Out Layer:
  lines w15: 10,-1165 3365,-1165 3365,1165 10,1165 10,-1165

## Other copper
Bottom Layer:
  text "I.Chudakov" at 300,-1120 h50

## Silkscreen, mask and mechanical layers (free items; w line width, h text height)
Top Overlay:
  text "for iXBTScope Project" at 2695,1095 h65
  text "Attenuator Prototype" at 1773,1092 h80
  text "GND" at 1970,1025 h60
  text "Chudik, Зануда © 2010" at 2685,1015 h65
  text "Ladder Attenuator" at 1790,840 h60
  text "+5V" at 3130,315 h80
  text "Sectioned Attenuator" at 2345,285 h60
  text "-5V" at 3102,-410 h80
  text "GND" at 1400,-775 h50
  text "Active Attenuator" at 1965,-1100 h60
Mechanical 1:
  lines w5: 0,-1180 0,1175 3375,1175 3375,-1175 0,-1175
Mechanical 13:
  circle w5: c420,585 r29.15
  circle w5: c1940,-385 r29.15
  circle w5: c2044.05,-278.5 r29.15
  circle w5: c615,360 r29.15
  circle w5: c745,420 r29.15
  circle w5: c820,650 r29.15
  circle w5: c690,785 r29.15
  lines w5: 525,1165 525,855 1750,855 1750,1165 ; 1270,-675 1270,-855 1275,-850 ; 940,-285 940,310 1845,310 1845,-285 940,-285

## Text inside footprints (layer, text, board x,y; h text height)
P1: Top Overlay "1" at 80,1050 h35 r270; Top Overlay "2" at 180,1050 h35 r270; Top Overlay "40" at 180,-1030 h35 r270; Top Overlay "39" at 80,-1030 h35 r270
P6: Top Overlay "6" at 2189,431 h35 r270; Top Overlay "5" at 2089,433 h35 r270; Top Overlay "2" at 2175,800 h35 r270; Top Overlay "1" at 2090,787 h35 r270
P7: Top Overlay "2" at 2945,210 h35 r270; Top Overlay "1" at 2845,190 h35 r270
P10: Top Overlay "2" at 2355,-690 h35 r270; Top Overlay "1" at 2255,-710 h35 r270
P13: Top Overlay "10" at 3243,-276 h50 r270; Top Overlay "9" at 3135,-273 h50 r270; Top Overlay "1" at 3134,285 h50 r270; Top Overlay "2" at 3235,295 h50 r270